# Altium PCB PCB1.PcbDoc
Units mil, origin at the board's own origin, x right, y up, seen from the top; angles counter-clockwise.
Board outline 3228.35 x 2559.06 mil, 2 copper layers (Top Layer, Bottom Layer); 67 components, 69 nets, 262 pads, 85 vias.
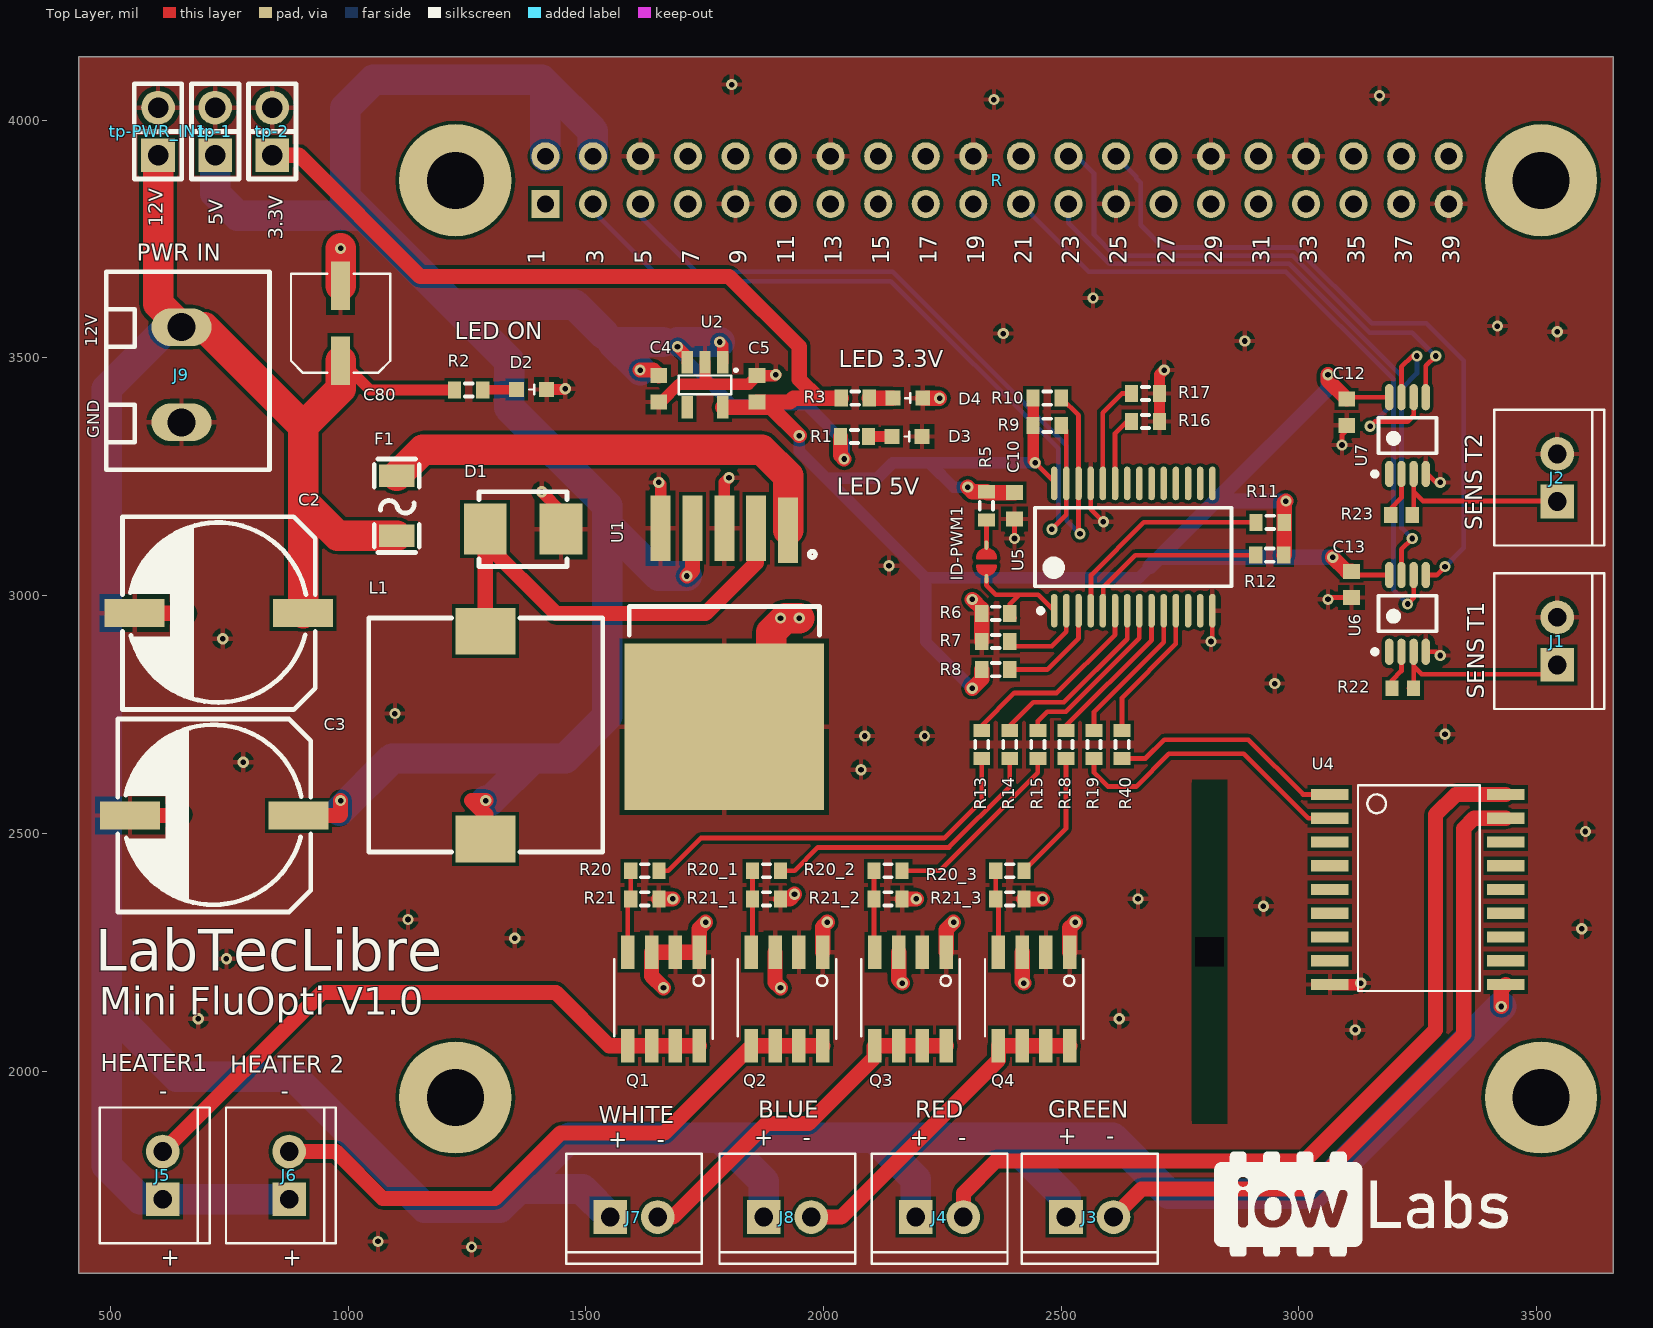
[diagram p0: Top Layer view]
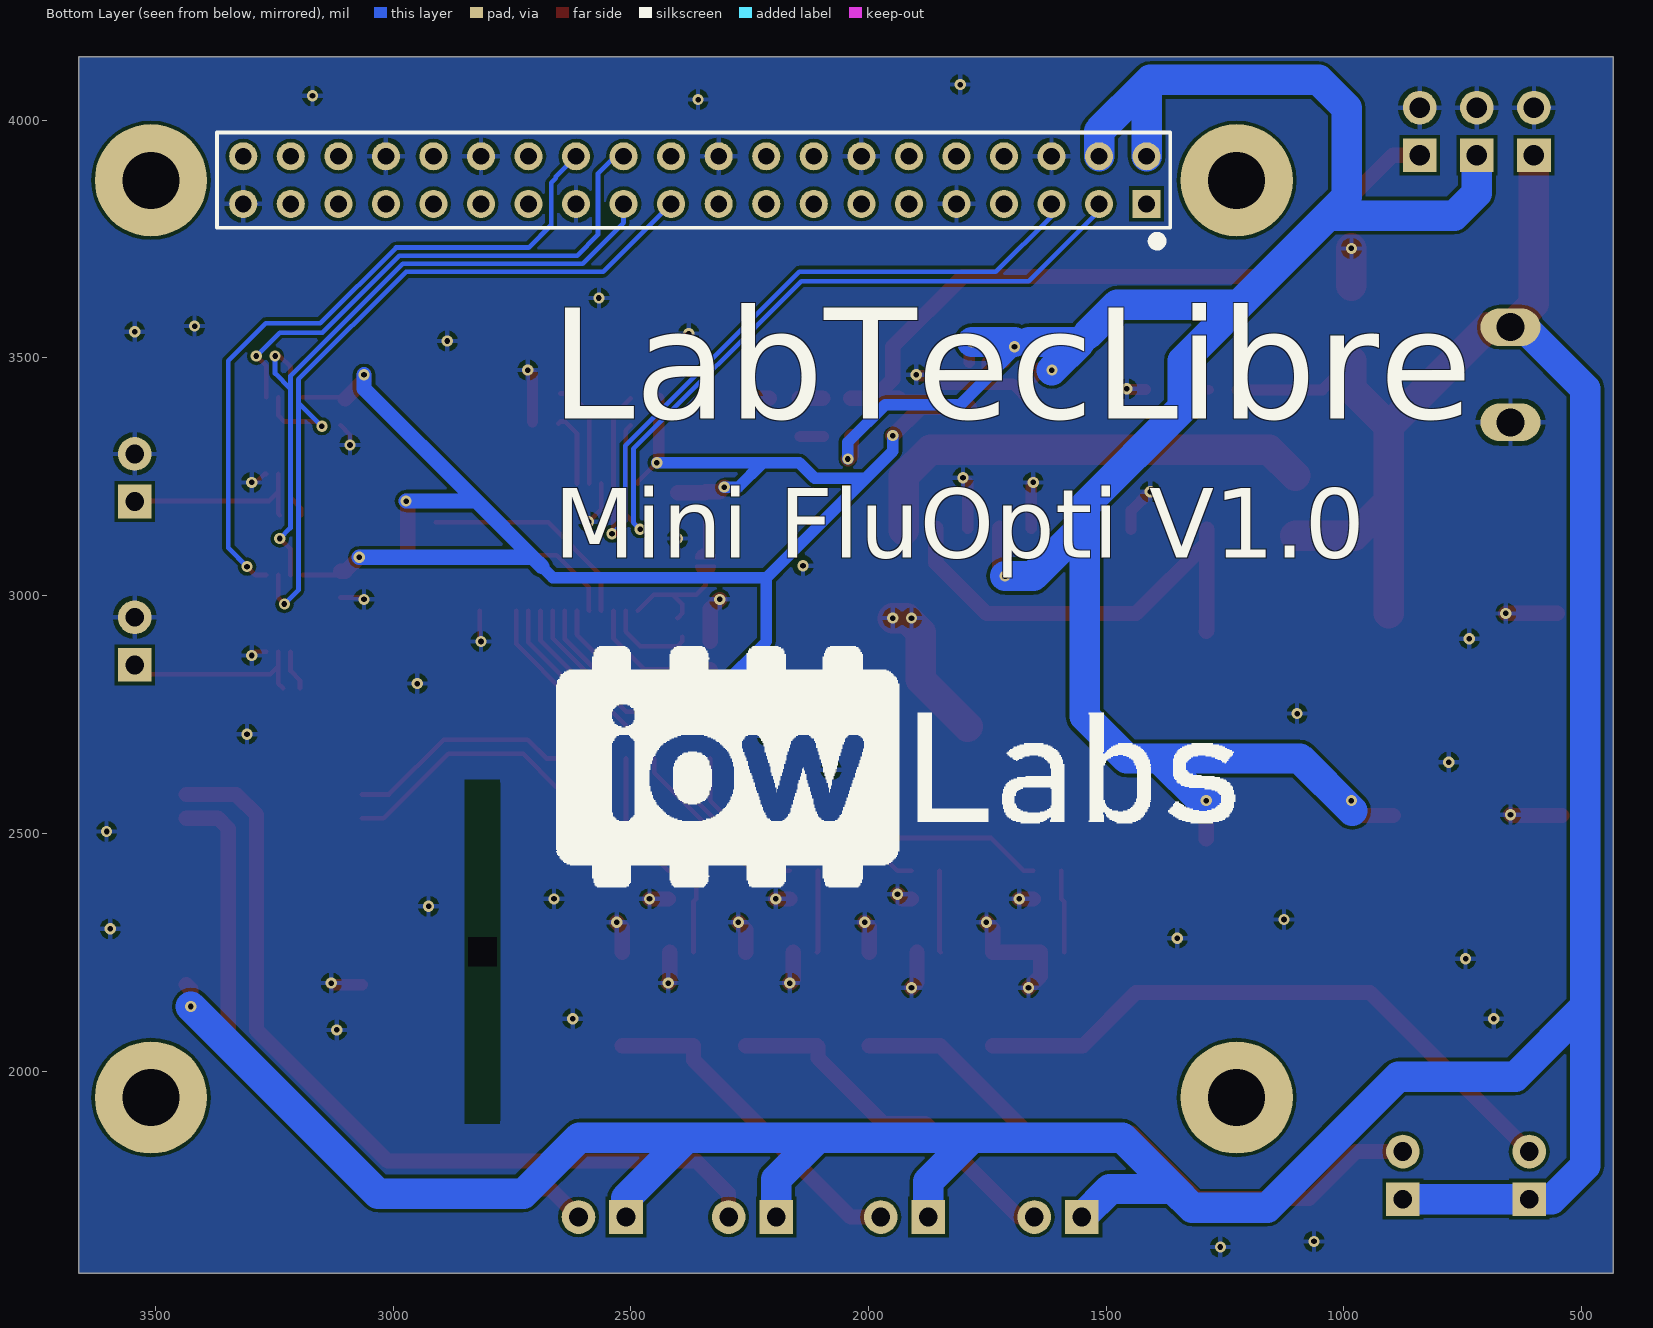
[diagram p1: Bottom Layer view, seen from below]

## Layer stack, top to bottom
Top Solder: solder mask 0.4, Solder Resist, Dk 3.5
Top Layer: signal copper 1.4
Dielectric 1: dielectric 12.6, FR-4, Dk 4.8
Bottom Layer: signal copper 1.4
Bottom Solder: solder mask 0.4, Solder Resist, Dk 3.5

## Board outline
433.07,1574.8 3661.42,1574.8 3661.42,4133.86 433.07,4133.86

## Design rules (kind name [scope] priority, off if disabled: settings)
Clearance [All] p1: gap=7 ignorepadtopadclearanceinfootprint=FALSE
MinimumSolderMaskSliver [All] p1: minsoldermaskwidth=4
PolygonConnect [All] p1: connectstyle=Relief reliefconductorwidth=10 reliefentries=4 polygonreliefangle="90 Angle" airgapwidth=10
RoutingVias [All] p1: holewidth=11.81 width=23.62 viastyle="Through Hole" minholewidth=11.81 minwidth=23.62 maxholewidth=11.81 maxwidth=23.62
SilkToSilkClearance [All] p1: silktosilkclearance=4
SilkToSolderMaskClearance [IsPad] p1: minsilkscreentomaskgap=4 clearancetoexposedcopper=TRUE
SolderMaskExpansion [All] p1: expansion=4
Width [All] p1: maxlimit=64 minlimit=10 preferedwidth=24
27 further rules are at their usual default settings.

## Classes and differential pairs
component class TopLevel: C80 J9 tp-PWR_IN1
component class U_Rasp: R
component class Drivers: Q1 Q2 Q3 Q4 R20 R20_1 R20_2 R20_3 R21 R21_1 R21_2 R21_3 U4
component class "Generador PWM": 5 C10 ID-PWM1 R5 R6 R7 R8 R9 R10 R11 R12 R13 R14 R15 R16 R17 R18 R19 R40 U5
component class Salidas: J3 J4 J5 J6 J7 J8
component class U_DCDC_stepdown: C2 C3 C4 C5 D1 D2 D3 D4 F1 L1 R1 R2 R3 tp-1 tp-2 U1 U2
component class ADC: C12 C13 J1 J2 R22 R23 T2 U6 U7

## Components (designator, comment, footprint, x,y, rotation, side; value= is the part's Value field where it differs from the comment)
C2 "Cap pol" CAP_SMD_Electrolytic_10x10 728.35,2963.06 r180 top value=680uF
C3 "Cap pol" CAP_SMD_Electrolytic_10x10 718.5,2537.54 r180 top value=330uF
C4 "Cap Semi" 1608[0603] 1653.54,3435.04 r90 top value=1uF
C5 "Cap Semi" 1608[0603] 1860.24,3435.04 r270 top value=1uF
C10 "Cap Semi" 1608[0603] 2401.57,3188.98 r90 top value=10uF
C12 "Cap Semi" 1608[0603] 3100.39,3385.83 r90 top value=100nF
C13 "Cap Semi" 1608[0603] 3110.24,3023.62 r90 top value=100nF
C80 "Cap pol" CAP_SMD_Electrolytic_5X5.4 984.25,3572.83 r90 top value=47uF
D1 "Schottky Diode" SMB_L4.6-W3.6-LS5.3-RD 1368.11,3139.76 r180 top
D2 "Generic LED" LED0603 1386.2,3433.51 r0 top
D3 "Generic LED" LED0603 2175.43,3334.65 r0 top
D4 "Generic LED" LED0603 2177.17,3415.35 r0 top
F1 "Generic Fuse" F1206 1102.36,3188.98 r90 top
ID-PWM1 "sj" SJ2 2342.52,3070.87 r270 top
J1 "Generic header 2x1" JST-2x1 3543.31,2904.33 r90 top
J2 "Generic header 2x1" JST-2x1 3543.31,3248.03 r90 top
J3 "Generic header 2x1" JST-2x1 2559.84,1692.91 r0 top
J4 "Generic header 2x1" JST-2x1 2244.09,1692.91 r0 top
J5 "Generic header 2x1" JST-2x1 610.24,1780.71 r90 top
J6 "Generic header 2x1" JST-2x1 875.98,1780.71 r90 top
J7 "Generic header 2x1" JST-2x1 1601.18,1692.91 r0 top
J8 "Generic header 2x1" JST-2x1 1924.02,1692.91 r0 top
J9 "Tblock 2x1" T_BLOCK_2P 649.61,3464.57 r270 top
L1 "Inductor" IND-SMD_L12.5-W12.5_SMDRS1275 1289.37,2706.69 r270 top value=33uH
Q1 "IRF7401PbF-1" SOIC8 1663.39,2151.57 r180 top
Q2 "IRF7401PbF-1" SOIC8 1923.2,2151.57 r180 top
Q3 "IRF7401PbF-1" SOIC8 2183.02,2151.57 r180 top
Q4 "IRF7401PbF-1" SOIC8 2442.84,2151.57 r180 top
R "RPI GPIO Connector" rpi 2365,3874 r180 top
R1 "Res3" J1-0603 2064.96,3334.65 r180 top value=220
R2 "Res3" J1-0603 1253.71,3432.51 r180 top value=442
R3 "Res3" J1-0603 2066.7,3415.35 r180 top value=150
R5 "Res3" J1-0603 2342.52,3188.98 r270 top value=2K
R6 "Res3" J1-0603 2362.2,2962.6 r0 top value=10K
R7 "Res3" J1-0603 2362.2,2903.54 r0 top value=10K
R8 "Res3" J1-0603 2362.2,2844.49 r0 top value=2K
R9 "Res3" J1-0603 2470.47,3358.1 r0 top value=2K
R10 "Res3" J1-0603 2470.47,3415.35 r0 top value=2K
R11 "Res3" J1-0603 2939.47,3154.15 r180 top value=2K
R12 "Res3" J1-0603 2938.47,3085.15 r180 top value=2K
R13 "Res3" J1-0603 2332.68,2687.01 r90 top value=220
R14 "Res3" J1-0603 2391.73,2687.01 r90 top value=220
R15 "Res3" J1-0603 2450.79,2687.01 r90 top value=220
R16 "Res3" J1-0603 2677.17,3366.14 r180 top value=10K
R17 "Res3" J1-0603 2677.17,3425.2 r180 top value=10K
R18 "Res3" J1-0603 2509.84,2687.01 r90 top value=220
R19 "Res3" J1-0603 2568.9,2687.01 r90 top value=220
R20 "Res3" J1-0603 1624.02,2421.26 r180 top value=110
R20_1 "Res3" J1-0603 1879.92,2421.26 r180 top value=110
R20_2 "Res3" J1-0603 2135.83,2421.26 r180 top value=110
R20_3 "Res3" J1-0603 2391.73,2421.26 r180 top value=110
R21 "Res3" J1-0603 1624.02,2362.2 r180 top value=10K
R21_1 "Res3" J1-0603 1879.92,2362.2 r180 top value=10K
R21_2 "Res3" J1-0603 2135.83,2362.2 r180 top value=10K
R21_3 "Res3" J1-0603 2391.73,2362.2 r180 top value=10K
R22 "CRCW06033K74FKEA" RESC1609X50X30LL10T20 3218.5,2805.12 r180 top value=4.22k
R23 "CRCW06033K74FKEA" RESC1609X50X30LL10T20 3215.55,3169.29 r180 top value=4.22k
R40 "Res3" J1-0603 2627.95,2687.01 r90 top value=220
tp-1 "Pin Header 2x1" HDR-TH_P2.54-H-M_A2541WV-2P 720.4,3976.38 r90 top
tp-2 "Pin Header 2x1" HDR-TH_P2.54-H-M_A2541WV-2P 840.41,3976.38 r90 top
tp-PWR_IN1 "Pin Header 2x1" HDR-TH_P2.54-H-M_A2541WV-2P 600.39,3976.38 r90 top
U1 "LM2596-5V" TO-263-5 1791.34,2933.07 r90 top
U2 "AP2112K-3.3TRG1" SOT25-5 1750.73,3443.33 r0 top
U4 "ULN2803A" SOIC18 3064.96,2581.89 r0 top
U5 "PCA9685" SSOP-28_L 2651.47,3102.15 r90 top
U6 "MAX6682MUA+T" MAXM-U8+1_L 3228.35,2962.6 r90 top
U7 "MAX6682MUA+T" MAXM-U8+1_L 3228.35,3336.61 r90 top

## Footprints (in the part's own frame and the unit in brackets; to place one, negate y for a bottom-side part, rotate by r counter-clockwise, add the part's x,y. Pads: shape width x height; smd on the part's side, far side on the other; paste and mask are expansions set on the pad)
1608[0603] [mm] "Chip Capacitor, Body 1.6x0.8mm, IPC High Density"
  rect 0.8x0.9 smd: 1(-0.7,0) 2(0.7,0)
  body extent -0.87,-0.48 0.87,0.48, height 1.3
CAP_SMD_Electrolytic_5X5.4 [mm]
  rect 2.6x1 smd: 1(2,0) 2(-2,0)
  silkscreen extent -2.65,-2.65 2.65,2.65, body extent -2.95,-2.76 2.95,2.76, height 5.57
CAP_SMD_Electrolytic_10x10 [mm]
  rect 3.2x1.5 smd: 1(4.5,0) 2(-4.5,0)
  silkscreen extent -5.15,-5.15 5.15,5.15, body extent -6,-5.25 6,5.25, height 10.5
F1206 [mm]
  rect 1.2x1.9 smd: 1(-1.6,0) 2(1.6,0)
  silkscreen extent -2.5,-1.2 2.5,1.2, body extent -1.7,-0.89 1.7,0.89, height 0.84
HDR-TH_P2.54-H-M_A2541WV-2P [mm]
  rect 1.8x1.8 hole 1.1: 1(-1.27,0)
  round 1.8 hole 1.1: 2(1.27,0)
  silkscreen extent -2.54,-1.27 2.54,1.27, body extent -2.46,-1.16 2.62,1.24, height 8.36
IND-SMD_L12.5-W12.5_SMDRS1275 [mm]
  rect 2.5x3.2 smd: 1(-5.55,0) 2(5.55,0)
  silkscreen extent -6.25,-6.25 6.25,6.25, body extent -6.25,-6.25 6.25,6.25, height 7.8
J1-0603 [mm] "Chip Resistor, Body 1.6x0.8mm, IPC High Density"
  rect 0.7x0.9 smd: 1(-0.75,0) 2(0.75,0)
  silkscreen extent -0.2,-0.35 0.2,0.35, body extent -0.85,-0.48 0.85,0.48, height 0.9
JST-2x1 [mm] "JST- TH-2x1-P2.5-XH"
  rect 1.8x1.8 hole 1: 1(-1.27,0)
  round 1.8 hole 1: 2(1.27,0)
  silkscreen extent -3.62,-2.5 3.62,3.37, body extent -3.61,-2.49 3.61,3.35, height 7.21
LED0603 [mm] "LED 0603"
  rect 0.8x0.8 smd: 1(-0.8,0) 2(0.8,0)
  silkscreen extent -0.13,-0.25 0.13,0.25, body extent -0.8,-0.4 0.8,0.4, height 0.4
MAXM-U8+1_L [mm] "SOP, 8-Leads, Body 3x3mm, Pitch 0.65mm, IPC High Density"
  oval 1.4x0.45 smd: 1(-2.05,0.975) 2(-2.05,0.325) 3(-2.05,-0.325) 4(-2.05,-0.975) 5(2.05,-0.975) 6(2.05,-0.325) 7(2.05,0.325) 8(2.05,0.975)
  silkscreen extent -2.17,-1.55 0.95,1.87, body extent -1.55,-1.55 1.55,1.55, height 1.1
RESC1609X50X30LL10T20 [mm] "Chip Resistor, 2-Leads, Body 1.55x0.85mm, IPC High Density"
  rect 0.7x0.85 smd: 1(-0.575,0) 2(0.575,0)
  body extent -0.82,-0.48 0.82,0.48, height 0.5
rpi [mm]
  rect 1.5x1.5 hole 0.9: 1(24.13,1.27)
  round 1.5 hole 0.9: 2(24.13,-1.27) 3(21.59,1.27) 4(21.59,-1.27) 5(19.05,1.27) 6(19.05,-1.27) 7(16.51,1.27) 8(16.51,-1.27) 9(13.97,1.27) 10(13.97,-1.27) 11(11.43,1.27) 12(11.43,-1.27) 13(8.89,1.27) 14(8.89,-1.27) 15(6.35,1.27) 16(6.35,-1.27) 17(3.81,1.27) 18(3.81,-1.27) 19(1.27,1.27) 20(1.27,-1.27) 21(-1.27,1.27) 22(-1.27,-1.27) 23(-3.81,1.27) 24(-3.81,-1.27) 25(-6.35,1.27) 26(-6.35,-1.27) 27(-8.89,1.27) 28(-8.89,-1.27) 29(-11.43,1.27) 30(-11.43,-1.27) 31(-13.97,1.27) 32(-13.97,-1.27) 33(-16.51,1.27) 34(-16.51,-1.27) 35(-19.05,1.27) 36(-19.05,-1.27) 37(-21.59,1.27) 38(-21.59,-1.27) 39(-24.13,1.27) 40(-24.13,-1.27)
  body extent -25.52,-2.63 25.53,2.38, height 8.5
SJ2 [mm]
  oval 0.5x0.2 smd: 1(-0.9,0) 2(0.9,0)
  Top Layer region: -0.238,-0.491 -0.455,-0.442 -0.629,-0.303 -0.726,-0.103 -0.726,0.12 -0.629,0.32 -0.455,0.459 -0.238,0.509 -0.238,0.509
  Top Layer region: 0.2,-0.5 0.417,-0.45 0.591,-0.312 0.687,-0.111 0.687,0.111 0.591,0.312 0.417,0.45 0.2,0.5 0.2,0.5
  Top Layer lines w0.127: 0.2,-0.5 ccw(c0.2,0) 0.699,-0.025 ccw(c0.2,0) 0.2,0.5 0.2,-0.5 ; -0.2,-0.5 cw(c-0.2,0) -0.699,-0.025 cw(c-0.2,0) -0.2,0.5 -0.2,-0.5
SMB_L4.6-W3.6-LS5.3-RD [mm]
  rect 2.29x2.72 smd: 1(-2.025,0) 2(2.025,0)
  silkscreen extent -2.35,-2 2.35,2, body extent -2.79,-1.97 2.8,1.97, height 2.5
SOIC8 [mm]
  rect 0.72x1.8 smd: 1(-1.905,-2.5) 2(-0.635,-2.5) 3(0.635,-2.5) 4(1.905,-2.5) 5(1.905,2.5) 6(0.635,2.5) 7(-0.635,2.5) 8(-1.905,2.5)
  silkscreen extent -2.62,-2.13 2.62,2.13, body extent -2.5,-3.08 2.5,3.08, height 2
SOIC18 [mm]
  rect 2x0.6 smd: 1(0,0) 2(0,-1.27) 3(0,-2.54) 4(0,-3.81) 5(0,-5.08) 6(0,-6.35) 7(0,-7.62) 8(0,-8.89) 9(0,-10.16) 10(9.4,-10.16) 11(9.4,-8.89) 12(9.4,-7.62) 13(9.4,-6.35) 14(9.4,-5.08) 15(9.4,-3.81) 16(9.4,-2.54) 17(9.4,-1.27) 18(9.4,0)
  silkscreen extent 1.5,-10.5 8,0.5, body extent -0.48,-10.88 9.83,0.68, height 2.64
SOT25-5 [mm]
  rect 0.6x1.2 smd: 1(0.95,1.2) 2(0,1.2) 3(-0.95,1.2) 4(-0.95,-1.2) 5(0.95,-1.2)
  silkscreen extent -1.4,-0.5 1.68,0.81, body extent -1.55,-1.47 1.55,1.53, height 1.45
SSOP-28_L [mm] "SOP, 28-Leads, Body 10.2x5.3mm, Pitch 0.65mm, IPC High Density"
  oval 1.8x0.35 smd: 1(-3.4,4.225) 2(-3.4,3.575) 3(-3.4,2.925) 4(-3.4,2.275) 5(-3.4,1.625) 6(-3.4,0.975) 7(-3.4,0.325) 8(-3.4,-0.325) 9(-3.4,-0.975) 10(-3.4,-1.625) 11(-3.4,-2.275) 12(-3.4,-2.925) 13(-3.4,-3.575) 14(-3.4,-4.225) 15(3.4,-4.225) 16(3.4,-3.575) 17(3.4,-2.925) 18(3.4,-2.275) 19(3.4,-1.625) 20(3.4,-0.975) 21(3.4,-0.325) 22(3.4,0.325) 23(3.4,0.975) 24(3.4,1.625) 25(3.4,2.275) 26(3.4,2.925) 27(3.4,3.575) 28(3.4,4.225)
  silkscreen extent -3.52,-5.25 2.1,5.25, body extent -2.8,-5.25 2.8,5.25, height 2
T_BLOCK_2P [mm] "PITCH 5.0, 3 POS"
  oval 2x3.2 hole 1.5: 1(-2.54,0) 2(2.54,0)
  silkscreen extent -5.5,-4.01 5.08,4.7, body extent -5.6,-2.9 5,4.7, height 10
TO-263-5 [mm]
  rect 3.5x1.069 smd: 1(5.2,-3.404) 2(5.3,-1.702) 3(5.3,0) 4(5.3,1.702) 5(5.3,3.404)
  rect 8.89x10.66 smd: 6(-5.3,0)
  silkscreen extent -0.41,-5.08 4.07,5.08, body extent -8.55,-5.1 5.8,5.08, height 4.58

## Part data
C2: "Electrolytic Aluminium Capacitor", Manufacturer=PANASONIC, Manufacturer Part Number=EEEFK1V681AQ, Package=SMD,12.5x13.5mm, Supplier Part Number 1=C178568, Voltage=35V, Supplier 1=LCSC
C3: "Electrolytic Aluminium Capacitor", Manufacturer=PANASONIC, Manufacturer Part Number=EEE1VA331UAP, Package="SMD, 10X10mm", Supplier Part Number 1=C249650, Voltage=35V, Supplier 1=LCSC
C4 C5: "Capacitor (Semiconductor SIM Model)", Manufacturer="Samsung Electro-Mechanics", Manufacturer Part Number=CL10B105KO8NNNC, Supplier Part Number 1=C59782, LatestRevisionDate=29-May-2009, LatestRevisionNote="IPC-7351 Footprint Added.", PackageDescription="Chip Capacitor", PackageReference=C0603, Published=8-Jun-2000, Publisher="Altium Limited", Supplier 1=LCSC
C10: "Capacitor (Semiconductor SIM Model)", Manufacturer="Samsung Electro-Mechanics", Manufacturer Part Number=CL10A106MQ8NNNC, Supplier Part Number 1=C92487, LatestRevisionDate=29-May-2009, LatestRevisionNote="IPC-7351 Footprint Added.", PackageDescription="Chip Capacitor", PackageReference=C1206, Published=8-Jun-2000, Publisher="Altium Limited", Supplier 1=LCSC
C12 C13: "Capacitor (Semiconductor SIM Model)", Manufacturer="Taiyo Yuden", Manufacturer Part Number=UMK107B104KAHT, Supplier Part Number 1=C66501, LatestRevisionDate=29-May-2009, LatestRevisionNote="IPC-7351 Footprint Added.", PackageDescription="Chip Capacitor", PackageReference=C0603, Published=8-Jun-2000, Publisher="Altium Limited", Supplier 1=LCSC
C80: "Electrolytic Aluminium Capacitor", Supplier 1=LCSC
D1: "Schottky Diodes", Manufacturer="MCC(Micro Commercial Components)", Manufacturer Part Number=SK32B-LTP, Package=SMB, Reverse voltage=20V, Supplier Part Number 1=C180191, Supplier 1=LCSC
D2 D3 D4: library part LED, "Generic LED SMD", Color=Green, Package=0603, Supplier Part Number 1=C72043, Supplier 1=LCSC
F1: library part FUSE, "SMD Fuse", Current Rating=4.5A, Manufacturer=AEM, Manufacturer Part Number=F1206VH4500TM, Package=1206, Rated Voltage AC=65V, Supplier Part Number 1=C310980, Supplier 1=LCSC
ID-PWM1: library part Jumper, "solder jumper generic"
J1 J2 J3 J4 J5 J6 J7 J8: library part "Header - 2x1", "Generic Header 2pos, 1 row, 2.54 pitch", Manufacturer="CJT(Changjiang Connectors)", Manufacturer Part Number=A2547WV-2P, Package="Through Hole,P=2.54mm", Supplier Part Number 1=C20079, Pitch=2.54mm, Supplier 1=LCSC
J9: library part "Header - 2x1b", "Screw terminal 2pos, 1 row, 5pitch", Manufacturer="CJT(Changjiang Connectors)", Manufacturer Part Number=A2547WV-2P, Package="Through Hole,P=2.54mm", Supplier Part Number 1=C8404, Pitch=2.54mm, Supplier 1=LCSC
L1: "Inductor SMD", Manufacturer=GLE, Manufacturer Part Number=GCRH127M-330MC, Package=SMD,12.3x12.3x8mm, Supplier Part Number 1=C439422, Supplier 1=LCSC
Q1 Q2 Q3 Q4: library part IRF7401, "MOSFET N Channel 20V 8.7A 700mV @ 250uA 22mO @ 4.1A,4.5V SOIC-8_150mil RoHS", Manufacturer="Infineon Technologies", Manufacturer Part Number=IRF7401TRPBF, Package=SO-8, Supplier Part Number 1=C169089, Supplier 1=LCSC
R: library part "rpi connector", "GPIO Header for Raspberry Pi A+/B+/Pi 2/Pi 3 - 2x20", Manufacturer="SparkFun Electronics", Manufacturer Part Number=PRT-14017, Supplier Part Number 1=1568-1462-ND, Accessory Type=Connector, Category="Development Boards, Kits, Programmers", ComponentLink1Description=https://cdn.sparkfun.com/datasheets/Dev/RaspberryPi/12313.pdf, ComponentLink1URL=https://cdn.sparkfun.com/datasheets/Dev/RaspberryPi/12313.pdf, For Use With/Related Products="Raspberry Pi", Nils Minor=author, nilsminor@web.de=mail, Part Status=Active, Pricing 1="1=1.84 (EUR)", RoHS="RoHS Compliant", Stock 1=150, Supplier 1=LCSC
R1: "±1% ±100ppm/? 0.1W 220O 0603 Chip Resistor - Surface Mount ROHS", Manufacturer=YAGEO, Manufacturer Part Number=AC0603FR-07442RL, Supplier Part Number 1=C304718, LatestRevisionDate=29-May-2009, LatestRevisionNote="IPC-7351 Footprint Added.", PackageDescription="Chip Resistor", PackageReference=J1-0603, Published=8-Jun-2000, Publisher="Altium Limited", Supplier 1=LCSC
R2: "Resistor", Manufacturer=YAGEO, Manufacturer Part Number=AC0603FR-07442RL, Supplier Part Number 1=C23057, LatestRevisionDate=29-May-2009, LatestRevisionNote="IPC-7351 Footprint Added.", PackageDescription="Chip Resistor", PackageReference=J1-0603, Published=8-Jun-2000, Publisher="Altium Limited", Supplier 1=LCSC
R3: "Resistor", Manufacturer=YAGEO, Manufacturer Part Number=AC0603FR-07442RL, Supplier Part Number 1=C114608, LatestRevisionDate=29-May-2009, LatestRevisionNote="IPC-7351 Footprint Added.", PackageDescription="Chip Resistor", PackageReference=J1-0603, Published=8-Jun-2000, Publisher="Altium Limited", Supplier 1=LCSC
R5 R8 R9 R10 R11 R12: "Resistor", Manufacturer=YAGEO, Manufacturer Part Number=RC0603FR-072KL, Supplier Part Number 1=C105576, LatestRevisionDate=29-May-2009, LatestRevisionNote="IPC-7351 Footprint Added.", PackageDescription="Chip Resistor", PackageReference=J1-0603, Published=8-Jun-2000, Publisher="Altium Limited", Supplier 1=LCSC
R6 R7 R16 R17: "Resistor", Manufacturer=PANASONIC, Manufacturer Part Number=ERJPA3F1002V, Supplier Part Number 1=C441927, LatestRevisionDate=29-May-2009, LatestRevisionNote="IPC-7351 Footprint Added.", PackageDescription="Chip Resistor", PackageReference=J1-0603, Published=8-Jun-2000, Publisher="Altium Limited", Supplier 1=LCSC
R13 R14 R15 R18 R19 R40: "Resistor", Manufacturer=YAGEO, Manufacturer Part Number=RC0603FR-07220RL, Supplier Part Number 1=C304718, LatestRevisionDate=29-May-2009, LatestRevisionNote="IPC-7351 Footprint Added.", PackageDescription="Chip Resistor", PackageReference=J1-0603, Published=8-Jun-2000, Publisher="Altium Limited", Supplier 1=LCSC
R20 R20_1 R20_2 R20_3: "Resistor", Manufacturer="ROHM Semicon", Manufacturer Part Number=MCR03EZPFX1100, Supplier Part Number 1=C22781, LatestRevisionDate=29-May-2009, LatestRevisionNote="IPC-7351 Footprint Added.", PackageDescription="Chip Resistor", PackageReference=J1-0603, Published=8-Jun-2000, Publisher="Altium Limited", Supplier 1=LCSC
R21 R21_1 R21_2 R21_3: "Resistor", Manufacturer=PANASONIC, Manufacturer Part Number=ERJPA3F1002V, Supplier Part Number 1=C25804, LatestRevisionDate=29-May-2009, LatestRevisionNote="IPC-7351 Footprint Added.", PackageDescription="Chip Resistor", PackageReference=J1-0603, Published=8-Jun-2000, Publisher="Altium Limited", Supplier 1=LCSC
R22 R23: library part CMP-2000-03309-1, Manufacturer="Vishay Dale", Supplier Part Number 1=C170595, Part Number=CRCW06033K74FKEA, Supplier 1=LCSC
tp-1 tp-2 tp-PWR_IN1: library part "Header - 2x1c", "Pin Header 2pos, 1 row, 2.54 pitch", Manufacturer="CJT(Changjiang Connectors)", Manufacturer Part Number=A2541WV-2P, Supplier Part Number 1=C492401, Pitch=2.54, Supplier 1=LCSC
U1: "Step-Down Positive Fixed 1 3A 150kHz TO-263-5 DC-DC Converters RoHS", Manufacturer="HTC Korea TAEJIN Tech", Manufacturer Part Number=LM2596R-5.0, Package=TO-263-5, Supplier Part Number 1=C77782, Supplier 1=LCSC
U2: library part AP2112K-3.3, "600mA CMOS LDO REGULATOR WITH ENABLE", Manufacturer=DIODES, Package=SOT-25-5_L3.0-W1.8-P0.95-LS3.0-BL, Supplier Part Number 1=C150742, Manufacturer Part Number=AP2112K-3.3TRG1, Supplier 1=LCSC
U4: library part ULN2803, "Darlington transistor array driver SOIC-18_300mi", Manufacturer="Texas instrument", Manufacturer Part Number=ULN2803ADWR, Package=SOIC-18_300mil, Supplier Part Number 1=C33924, Supplier 1=LCSC
U5: "LED Drivers,16CH, I2C, TSSOP-28", Manufacturer="NXP Semicon", Manufacturer Part Number=PCA9685PW/Q900,118, Package=TSSOP-28, Supplier Part Number 1=C92206, Supplier 1=LCSC
U6 U7: library part CMP-0253-01037-1, "Thermistor-to-Digital Converter, 10 Bits Temperature Resolution, -55 to 125 degC, 8-Pin SOP (U8+1), Pb-Free, Tape and Reel", Generic Part Number=MAX6682, Supplier Part Number 1=C2653145, Code_JEDEC=MO-187, ComponentLink1Description="Manufacturer URL", ComponentLink1URL=http://www.maximintegrated.com/, ComponentLink2Description=Datasheet, ComponentLink2URL=http://datasheets.maximintegrated.com/en/ds/MAX6682.pdf, ComponentLink3Description="Package Specification", ComponentLink3URL=http://pdfserv.maximintegrated.com/package_dwgs/21-0036.PDF, DatasheetVersion="Rev. 0", Functions="Thermistor-to-Digital Converter", Interface=3-Wire/SPI, Mounting Technology="Surface Mount", PackageDescription="8-Pin Micro-MAX, Thin Shrink Small-Outline (U8+1), Body 3 x 3 mm, Pitch 0.65 mm", PackageReference=U8+1, PackageVersion="Rev. L, 08/2009", Packing="Tape and Reel", Parasite Pwr.=No, PartNumber=MAX6682MUA+T, Supplier 1=LCSC

## Free pads (board coordinates)
  rect 60x60 hole 60 square unplated: 7(2812,2251)
  round 236.22 hole 120: ""(1225.59,1944.41) ""(1225.59,3873.54) ""(3509.06,1944.41) ""(3509.06,3873.54)

## Via types
v1: diameter 23.62, hole 11.81, Top Layer to Bottom Layer, 85 vias

## Nets (pads, with @x,y where several pads share a name; then routed paths per layer and width w, separated by ;. In a path a pad name is that pad's centre, name@x,y a point inside that pad or via, vN(x,y) a via of type N, cw(c..) or ccw(c..) an arc to the next point about the centre after c; other vN are vias at no path point)
+3V3: C5.2 C10.2 C12.2 C13.2 R3.2 R5.1 R8.1 R9.1 R10.1 R11.1 R12.1 tp-2.1 U2.5 U5.28 U6.8 U7.8 | length 5315.6
  Top Layer w10: v1(2444.88,3279.53) 2485.13,3239.28 U5.28 ; C13.2 3118.11,3043.31 U6.8 ; C12.2@3110.24,3413.39 3114.17,3417.32 U7.8
  Top Layer w24: R10.1 R9.1 2440.94,3283.46 v1(2444.88,3279.53)
  Top Layer w32: tp-2.1 896.46,3926.38 1151.57,3671.26 1801.18,3671.26 1948.82,3523.62 1948.82,3454.72 1988.19,3415.35 ; U2.5 C5.2@1848.85,3396.09 ; v1(1948.82,3336.61) 1889.34,3396.09 C5.2@1848.85,3396.09 ; R3.2 1988.19,3415.35 ; v1(2303.15,3228.35) 2312.99,3218.5 R5.1 2344.49,3216.54 C10.2 ; v1(2312.99,2805.12) 2332.68,2824.8 R8.1 ; R12.1 2969,3086.15 R11.1 2969,3195.38 v1(2972.44,3198.82) ; v1(3061.02,3464.57) 3061.02,3452.76 C12.2 ; v1(3070.87,3080.71) 3100.39,3051.18 C13.2 ; C5.2@1848.85,3396.09 C5.2 1929.13,3407.48 1937.01,3415.35 1988.19,3415.35
  Bottom Layer w24: v1(1948.82,3336.61) 1948.82,3303.45 2005.57,3246.7 ; 2224.41,3277.56 2273.62,3228.35 v1(2303.15,3228.35) ; v1(2312.99,2805.12) 2214.57,2903.54 2214.57,3037.7 ; v1(2444.88,3279.53) 2145.67,3279.53 2112.84,3246.7 2005.57,3246.7 ; 2687.01,3061.02 2663.69,3037.7 2214.57,3037.7 ; 2005.57,3246.7 2214.57,3037.7
  Bottom Layer w32: 2687.01,3061.02 2706.69,3080.71 ; v1(2972.44,3198.82) 2824.8,3198.82 ; v1(3061.02,3464.57) 3061.02,3435.04 2824.8,3198.82 ; v1(3070.87,3080.71) 2706.69,3080.71 ; 2706.69,3080.71 2824.8,3198.82
+5V: C3.2 C4.2 L1.2 R1.2 R.2 R.4 tp-1.1 U1.4 U2.1 U2.3 | length 5387.7
  Top Layer w24: v1(1692.91,3523.62) 1713.33,3503.21 U2.3 ; v1(1781.5,3533.46) 1788.13,3526.83 U2.1
  Top Layer w32: C3.2 982.42,2537.54 984.25,2539.37 v1(984.25,2568.9) ; L1.2 1289.37,2539.37 1259.84,2568.9 v1(1289.37,2568.9) ; v1(1614.17,3474.41) 1641.73,3474.41 C4.2 ; v1(1712.6,3041.34) 1724.33,3053.07 U1.4 ; R1.2 2035.43,3295.28 v1(2043.31,3287.4)
  Bottom Layer w24: 1661.42,3533.46 1675.2,3533.46 1807.09,3401.57 1964.57,3401.57 2043.31,3322.83 v1(2043.31,3287.4)
  Bottom Layer w32: 1540.35,3548.23 1555.12,3533.46
  Bottom Layer w64: tp-1.1 720.4,3846.53 767.72,3799.21 1033.46,3799.21 ; 982.42,2547.38 1092.52,2657.48 1387.8,2657.48 ; v1(1289.37,2568.9) 1299.21,2568.9 1387.8,2657.48 ; R.2 1415,4077.13 ; R.4 1515,3977.13 1415,4077.13 ; 1540.35,3548.23 1476.38,3612.2 1220.47,3612.2 ; v1(1614.17,3474.41) 1555.12,3533.46 1661.42,3533.46 ; v1@1692.91,3533.46 v1(1781.5,3533.46) ; v1(1712.6,3041.34) 1653.54,3041.34 1545.28,3149.61 ; 1033.46,3799.21 1220.47,3612.2 ; 1033.46,3799.21 994.09,3838.58 994.09,4025.59 1053.15,4084.65 1407.48,4084.65 1415,4077.13 ; 1220.47,3612.2 1338.58,3494.09 1338.58,3395.67 1545.28,3188.98 1545.28,3149.61 ; 1387.8,2657.48 1456.69,2657.48 1545.28,2746.06 1545.28,3149.61
addr_pca9685_a0: ID-PWM1.2 R6.2 U5.1 | length 239.9
  Top Layer w10: ID-PWM1.2 2342.52,3021.65 2362.2,3001.97 2411.42,3001.97 ; R6.2@2401.57,2952.76 R6.2 2391.73,2982.28 2411.42,3001.97 ; U5.1 2451.46,3001.97 2411.42,3001.97
CH_0_aux: J4.2 U4.18 | length 1803.7
  Top Layer w32: J4.2 2294.09,1742.91 2362.2,1811.02 3011.81,1811.02 3287.4,2086.61 3287.4,2539.37 3329.92,2581.89 U4.18
CH_1_aux: J3.2 U4.17 | length 1426.4
  Top Layer w32: J3.2 2668.9,1751.97 3021.65,1751.97 3346.46,2076.77 3346.46,2509.84 3368.5,2531.89 U4.17
CH_2_aux: J5.2 Q1.5 Q1.6 Q1.7 Q1.8 | length 1313.2
  Top Layer w32: J5.2 944.88,2165.35 1437.01,2165.35 1549.21,2053.15 Q1.5 Q1.6 Q1.7 Q1.8
CH_3_aux: J6.2 Q2.5 Q2.6 Q2.7 Q2.8 | length 1295.9
  Top Layer w32: J6.2 974.41,1830.71 1072.83,1732.28 1309.06,1732.28 1446.85,1870.08 1665.13,1870.08 Q2.5 Q2.6 Q2.7 Q2.8
CH_4_aux: J7.2 Q3.5 Q3.6 Q3.7 Q3.8 | length 770
  Top Layer w32: J7.2 1683.07,1692.91 1879.92,1889.76 1968.5,1889.76 2106.3,2027.56 2106.3,2051.42 Q3.5 Q3.6 Q3.7 Q3.8
CH_5_aux: J8.2 Q4.5 Q4.6 Q4.7 Q4.8 | length 710.5
  Top Layer w32: J8.2 2037.4,1692.91 2367.84,2023.35 Q4.5 Q4.6 Q4.7 Q4.8
CS1: R.26 U6.5 | length 1460.6
  Top Layer w10: U6.5 3289.37,3043.31 v1(3307.09,3061.02)
  Bottom Layer w10: R.26 2657.48,3881.52 2657.48,3877.95 2667.32,3868.11 2667.32,3779.53 2714.75,3732.1 2993.57,3732.1 3152.83,3572.83 3267.72,3572.83 3346.46,3494.09 3346.46,3100.39 v1(3307.09,3061.02)
CS2: R.24 U7.5 | length 1117.1
  Top Layer w10: U7.5 3266.73,3483.27 v1(3287.4,3503.94)
  Bottom Layer w10: R.24 2532.69,3924 2568.9,3887.8 2568.9,3758.95 2612.74,3715.1 2986.52,3715.1 3148.48,3553.15 3238.19,3553.15 v1(3287.4,3503.94)
GND: C2.1 C3.1 C4.1 C5.1 C10.1 C12.1 C13.1 C80.1 D1.1 D2.2 D3.2 D4.2 J1.2 J2.2 J9.2 Q1.1 Q1.2 Q1.3 Q2.1 Q2.2 Q2.3 Q3.1 Q3.2 Q3.3 Q4.1 Q4.2 Q4.3 R6.1 R7.1 R16.1 R17.1 R21.1 R21_1.1 R21_2.1 R21_3.1 R.6 R.9 R.14 R.20 R.25 R.30 R.34 R.39 tp-1.2 tp-2.2 tp-PWR_IN1.2 U1.3 U1.5 U1.6 U2.2 U4.9 U5.14 U5.25 U6.4 U7.4 | length 2756.3
  Top Layer w10: v1(2401.57,3120.08) C10.1 ; U5.25 2561.91,3181.98 v1(2588.58,3155.31) ; v1(2814.96,2903.54) 2817.81,2906.39 U5.14 ; v1(3061.02,2992.13) 3064.96,2996.06 C13.1 ; v1(3090.55,3316.93) 3090.55,3338.58 C12.1@3110.24,3358.27 ; U6.4 3289.37,2881.89 v1(3297.24,2874.02) ; U7.4 3269.68,3255.91 3287.4,3238.19 v1(3297.24,3238.19)
  Top Layer w24: v1(1407.48,3218.5) 1447.83,3178.15 D1.1 ; D2.2 1455.17,3433.51 v1(1456.69,3435.04) ; v1(1653.54,3238.19) 1657.32,3234.41 U1.5 ; C4.1 1658.76,3407.48 1696.16,3444.88 1761.81,3444.88 ; U2.2 1750.73,3455.96 1761.81,3444.88 ; U1.3 1791.34,3238.19 v1(1801.18,3248.03) ; v1(1899.61,3464.57) 1897.64,3462.6 C5.1 1842.52,3444.88 1761.81,3444.88 ; R16.1 R17.1 2706.69,3464.57 v1(2716.54,3474.41) ; U4.9 3126.77,2181.89 v1(3129.92,2185.04)
  Top Layer w32: C3.1 647.78,2537.54 v1(649.61,2539.37) ; C2.1 658.99,2963.06 v1(659.45,2962.6) ; R21.1 v1(1683.07,2362.2) ; v1(1663.39,2175.2) 1638.39,2200.2 Q1.3 Q1.2 Q1.1 1738.39,2299.41 v1(1751.97,2312.99) ; Q2.3 1898.2,2186.44 v1(1909.45,2175.2) ; R21_1.1 1929.13,2362.2 v1(1938.98,2372.05) ; Q2.1 1998.2,2303.32 v1(2007.87,2312.99) ; Q3.3 2158.02,2192.37 v1(2165.35,2185.04) ; R21_2.1 v1(2194.88,2362.2) ; D4.2 v1(2244.09,3415.35) ; Q3.1 2258.02,2297.39 v1(2273.62,2312.99) ; v1(2312.99,2992.13) 2332.68,2972.44 R6.1 R7.1 ; Q4.3 2417.84,2188.46 v1(2421.26,2185.04) ; R21_3.1 v1(2460.63,2362.2) ; Q4.1 2517.84,2301.31 v1(2529.53,2312.99)
  Top Layer w64: C80.1 v1(984.25,3730.32) ; U1.6 1889.76,2822.83 1889.76,2923.23 1919.29,2952.76 v1(1948.82,2952.76)
  other v1: 1259.84,1629.92 1062.99,1641.73 3118.11,2086.61 685.04,2110.24 2622.05,2110.24 744.09,2236.22 1350.39,2279.53 3594.49,2299.21 1125.98,2318.9 2925.2,2346.46 2661.42,2362.2 3602.36,2503.94 2078.74,2633.86 779.53,2649.61 2086.61,2704.72 2212.6,2704.72 3307.09,2708.66 1098.43,2751.97 2948.82,2814.96 736.22,2909.45 1909.45,2952.76 2137.8,3062.99 2885.83,3535.43 2377.95,3551.18 3543.31,3555.12 3417.32,3566.93 2566.93,3625.98 2358.27,4043.31 3169.29,4051.18 1807.09,4074.8
NetD1_2: D1.2 L1.1 U1.2 | length 963.3
  Top Layer w32: D1.2 D1.2@1288.39,3111.22 ; L1.1 1288.39,2926.18 D1.2@1288.39,3111.22 ; U1.2 1858.35,3068.98 1751.97,2962.6 1437.01,2962.6 D1.2@1288.39,3111.22
NetD2_1: D2.1 R2.1 | length 71.9
  Top Layer w20: R2.1 1317.71,3432.51 1318.71,3433.51 D2.1
NetD3_1: D3.1 R1.1 | length 49.4
  Top Layer w24: R1.1 D3.1
NetD4_1: D4.1 R3.1 | length 49.4
  Top Layer w32: R3.1 D4.1
NetF1_2: F1.2 U1.1 | length 982.7
  Top Layer w64: F1.2 1157.48,3307.09 1870.08,3307.09 1925.35,3251.81 U1.1
NetID-PWM1_1: ID-PWM1.1 R5.2 | length 61.5
  Top Layer w10: ID-PWM1.1@2341.52,3098.4 2342.52,3099.4 ID-PWM1.1 R5.2
NetQ1_4: Q1.4 R20.2 R21.2 | length 173.8
  Top Layer w10: Q1.4 1588.39,2356.1 R21.2 R20.2
NetQ2_4: Q2.4 R20_1.2 R21_1.2 | length 172.2
  Top Layer w10: Q2.4 1850.39,2252.19 R21_1.2 R20_1.2
NetQ3_4: Q3.4 R20_2.2 R21_2.2 | length 282.5
  Top Layer w10: R20_2.2 R21_2.2 ; Q3.4 Q3.4@2106.3,2251.73 ; Q3.4@2106.3,2251.73 R21_2.2 ; Q3.4@2106.3,2251.73 R21_2.2
NetQ4_4: Q4.4 R20_3.2 R21_3.2 | length 173.6
  Top Layer w10: R20_3.2 R21_3.2 2367.84,2356.57 Q4.4
NetR7_2: R7.2 U5.2 | length 189.7
  Top Layer w10: R7.2@2391.73,2913.39 R7.2 2401.57,2893.7 2480.32,2893.7 2510.73,2924.11 U5.2
NetR8_2: R8.2 U5.3 | length 234.6
  Top Layer w10: R8.2@2391.73,2856.13 2403.37,2844.49 2470.47,2844.49 2536.32,2910.33 U5.3
NetR11_2: R11.2 U5.4 | length 468.5
  Top Layer w10: U5.4 2562.63,2969.02 2562.63,3043.31 2673.47,3154.15 R11.2
NetR12_2: R12.2 U5.5 | length 398.5
  Top Layer w10: U5.5 2588.22,2969.02 2588.22,3017.9 2655.47,3085.15 R12.2
NetR13_2: R13.2 U5.6 | length 419.8
  Top Layer w10: R13.2 2332.68,2726.38 2401.57,2795.28 2490.16,2795.28 2613.09,2918.21 U5.6
NetR14_2: R14.2 U5.7 | length 391.9
  Top Layer w10: R14.2 2391.73,2726.38 2440.95,2775.59 2505.49,2775.59 2638.68,2908.78 U5.7
NetR15_2: R15.2 U5.8 | length 363.2
  Top Layer w10: R15.2 2450.79,2736.22 2470.47,2755.91 2509.84,2755.91 2664.27,2910.33 U5.8
NetR16_2: R16.2 U5.23 | length 157
  Top Layer w10: U5.23 2613.09,3341.43 2637.8,3366.14 R16.2 R16.2@2652.46,3361.32
NetR17_2: R17.2 U5.24 | length 225.6
  Top Layer w10: U5.24 2587.5,3384.74 2627.95,3425.2 R17.2
NetR18_2: R18.2 U5.9 | length 326.3
  Top Layer w10: R18.2 2509.84,2726.38 2689.86,2906.39 U5.9
NetR19_2: R19.2 U5.10 | length 312.5
  Top Layer w10: R19.2 2568.9,2755.9 2715.45,2902.46 U5.10
NetR22_2: R22.2 U6.2 | length 84.9
  Top Layer w10: R22.2 3195.87,2821.85 3215.55,2841.53 U6.2
NetR23_2: R23.2 U7.2 | length 96
  Top Layer w10: R23.2 3192.91,3183.07 3215.55,3205.71 U7.2
NetR40_2: R40.2 U5.11 | length 298.6
  Top Layer w10: R40.2 2627.95,2785.43 2741.04,2898.52 U5.11
NetR_7: R.7
NetR_8: R.8
NetR_10: R.10
NetR_11: R.11
NetR_12: R.12
NetR_13: R.13
NetR_15: R.15
NetR_16: R.16
NetR_18: R.18
NetR_19: R.19
NetR_22: R.22
NetR_29: R.29
NetR_31: R.31
NetR_32: R.32
NetR_33: R.33
NetR_35: R.35
NetR_36: R.36
NetR_37: R.37
NetR_38: R.38
NetR_40: R.40
PWM_0_in: R13.1 R20.1 | length 828.9
  Top Layer w10: R20.1 1673.23,2421.26 1742.13,2490.16 2253.94,2490.16 2332.68,2568.9 R13.1
PWM_1_in: R14.1 R20_1.1 | length 614.7
  Top Layer w10: R20_1.1 1938.98,2421.26 1988.19,2470.47 2263.78,2470.47 2391.73,2598.43 R14.1
PWM_2_in: R15.1 R20_2.1 | length 400.6
  Top Layer w10: R20_2.1 2244.09,2421.26 2450.79,2627.95 R15.1
PWM_3_in: R18.1 R20_3.1 | length 272.9
  Top Layer w10: R20_3.1 2509.84,2509.84 R18.1
PWM_4_in: R19.1 U4.2 | length 622.5
  Top Layer w10: R19.1 2568.9,2627.95 2598.43,2598.43 2657.48,2598.43 2726.38,2667.32 2883.86,2667.32 3019.29,2531.89 U4.2
PWM_5_in: R40.1 U4.1 | length 500.9
  Top Layer w10: R40.1 2677.16,2657.48 2716.54,2696.85 2893.7,2696.85 3008.66,2581.89 U4.1
SCK: R.23 U6.7 U7.7 | length 1499.3
  Top Layer w10: U6.7 3215.55,3097.44 v1(3238.19,3120.08) ; U7.7 3215.55,3481.3 3238.19,3503.94 v1(3248.03,3503.94)
  Bottom Layer w10: R.23 2515,3784.21 2601.11,3698.1 2979.48,3698.1 3215.82,3461.77 3215.82,3435.04 ; v1(3238.19,3120.08) 3215.82,3142.45 3215.82,3435.04 ; v1(3248.03,3503.94) 3248.03,3467.25 3215.82,3435.04
SCL_BUS: R10.2 R.5 U5.26 | length 1620.9
  Top Layer w10: R10.2 2536.32,3379.04 U5.26 2536.32,3132.98 v1(2539.37,3129.92)
  Bottom Layer w10: R.5 1615,3798.39 1732.28,3681.1 2145.67,3681.1 2511.28,3315.49 2511.28,3158.01 v1(2539.37,3129.92)
SDA_BUS: R9.2 R.3 U5.27 | length 1611
  Top Layer w10: v1(2480.32,3139.76) 2510.73,3170.17 U5.27 2510.73,3347.38 R9.2
  Bottom Layer w10: R.3 1515,3809.8 1663.39,3661.42 2141.31,3661.42 2494.28,3308.45 2494.28,3153.73 v1(2480.32,3139.76)
SO: R.21 U6.6 U7.6 | length 1696.7
  Top Layer w10: v1(3149.61,3356.3) 3159.45,3366.14 3228.35,3366.14 3241.14,3378.94 U7.6 ; v1(3228.35,2982.28) 3241.14,2995.08 U6.6
  Bottom Layer w10: R.21 2557.9,3681.1 2972.44,3681.1 3198.82,3454.72 3198.82,3405.51 ; v1(3149.61,3356.3) 3198.82,3405.51 ; v1(3228.35,2982.28) 3198.82,3011.81 3198.82,3405.51
TempSens1: J1.1 R22.1 U6.3 | length 398.1
  Top Layer w10: R22.1@3231.3,2805.12 3241.14,2814.96 3241.14,2851.38 ; U6.3 3241.14,2851.38 ; J1.1 3523.62,2834.65 3257.87,2834.65 3241.14,2851.38
TempSens2: J2.1 R23.1 U7.3 | length 398.5
  Top Layer w10: R23.1 3241.14,3172.24 3241.14,3218.5 ; U7.3 3241.14,3218.5 ; J2.1 3542.52,3198.82 3260.83,3198.82 3241.14,3218.5
V_PWR: C2.2 C80.2 F1.1 J3.1 J4.1 J5.1 J6.1 J7.1 J8.1 J9.1 R2.2 tp-PWR_IN1.1 U4.10 | length 8317.2
  Top Layer w24: C80.2 1045.83,3432.51 R2.2
  Top Layer w32: v1(3425.2,2135.83) 3425.2,2172.05 U4.10
  Top Layer w64: tp-PWR_IN1.1 600.39,3613.78 J9.1 697.24,3564.57 905.51,3356.3 ; C2.2 905.51,3198.82 ; C80.2 984.25,3435.04 905.51,3356.3 ; F1.1 978.35,3125.98 905.51,3198.82 ; 905.51,3198.82 905.51,3356.3
  Bottom Layer w64: J9.1 621.65,3564.57 492.13,3435.04 492.13,2135.83 ; J6.1 J5.1 562.6,1730.71 492.13,1801.18 492.13,2135.83 ; J7.1 1492.13,1751.97 1358.27,1751.97 ; J8.1 1874.02,1767.72 1781.5,1860.24 ; J4.1 2194.09,1772.44 2106.3,1860.24 ; J3.1 2509.84,1732.28 2381.89,1860.24 ; v1(3425.2,2135.83) 3031.5,1742.13 2726.38,1742.13 2608.27,1860.24 2381.89,1860.24 ; 492.13,2135.83 639.76,1988.19 885.83,1988.19 1161.42,1712.6 1318.9,1712.6 1358.27,1751.97 ; 1358.27,1751.97 1466.54,1860.24 1781.5,1860.24 ; 1781.5,1860.24 2106.3,1860.24 ; 2106.3,1860.24 2381.89,1860.24
pads on no net: R.1 R.17 R.27 R.28 U2.4 U4.3 U4.4 U4.5 U4.6 U4.7 U4.8 U4.11 U4.12 U4.13 U4.14 U4.15 U4.16 U5.12 U5.13 U5.15 U5.16 U5.17 U5.18 U5.19 U5.20 U5.21 U5.22 U6.1 U7.1

## Polygon pours and split planes (outlines as drawn)
GND on Top Layer "GND_L01_P000" (solid, pour order 0): 433.07,4133.86 3661.42,4133.86 3661.42,1574.8 433.07,1574.8
GND on Bottom Layer "NONET_L-01_P-001" (solid, pour order 1): 433.07,4133.86 3661.42,4133.86 3661.42,1574.8 433.07,1574.8

## Silkscreen, mask and mechanical layers (free items; w line width, h text height)
Top Overlay:
  drawing of 6 lines, arcs and shapes, not listed
  text "5V" at 736.22,3779.53 h30 r90
  text "12V" at 610.24,3775.59 h30 r90
  text "3.3V" at 862.2,3748.03 h30 r90
  text "PWR IN" at 555.12,3704.72 h35
  text "1" at 1413.19,3697.17 h35 r90
  text "3" at 1538.19,3697.17 h35 r90
  text "5" at 1638.19,3697.17 h35 r90
  text "7" at 1738.19,3697.17 h35 r90
  text "9" at 1838.19,3697.17 h35 r90
  text "11" at 1938.19,3697.17 h35 r90
  text "13" at 2038.19,3697.17 h35 r90
  text "15" at 2138.19,3697.17 h35 r90
  text "17" at 2238.19,3697.17 h35 r90
  text "19" at 2338.19,3697.17 h35 r90
  text "21" at 2438.19,3697.17 h35 r90
  text "23" at 2538.19,3697.17 h35 r90
  text "25" at 2638.19,3697.17 h35 r90
  text "27" at 2738.19,3697.17 h35 r90
  text "29" at 2838.19,3697.17 h35 r90
  text "31" at 2938.19,3697.17 h35 r90
  text "33" at 3038.19,3697.17 h35 r90
  text "35" at 3138.19,3697.17 h35 r90
  text "37" at 3238.19,3697.17 h35 r90
  text "39" at 3338.19,3697.17 h35 r90
  text "LED ON" at 1224.41,3539.37 h35
  text "12V" at 472.44,3523.62 h25 r90
  text "LED 3.3V" at 2031.5,3480.32 h35
  text "GND" at 476.38,3330.71 h25 r90
  text "LED 5V" at 2027.56,3212.6 h35
  text "SENS T2" at 3385.83,3137.8 h35 r90
  text "SENS T1" at 3389.76,2783.46 h35 r90
  text "LabTecLibre" at 468.5,2181.1 h150
  text "Mini FluOpti V1.0" at 476.38,2098.43 h100
  text "HEATER1" at 480.31,2000 h35
  text "HEATER 2" at 751.97,1996.06 h35
  text "-" at 602.36,1940.94 h35
  text "-" at 858.27,1940.94 h35
  text "BLUE" at 1862.2,1901.57 h35
  text "RED" at 2192.91,1901.57 h35
  text "GREEN" at 2472.44,1901.57 h35
  text "WHITE" at 1527.56,1889.76 h35
  text "+" at 2492.13,1846.46 h35
  text "-" at 2594.49,1846.46 h35
  text "+" at 1854.33,1842.52 h35
  text "-" at 1956.69,1842.52 h35
  text "+" at 2181.1,1842.52 h35
  text "-" at 2283.46,1842.52 h35
  text "+" at 1547.24,1838.58 h35
  text "-" at 1649.61,1838.58 h35
  text "+" at 606.3,1590.55 h35
  text "+" at 862.2,1590.55 h35
Bottom Overlay:
  drawing of 7 lines, arcs and shapes, not listed
  text "LabTecLibre" at 2669.29,3295.28 h400
  text "Mini FluOpti V1.0" at 2661.42,3031.5 h250
Cutoff:
  the board outline again, w5